# EAGLE board Buttons_1.1 (EAGLE 7.6.0)
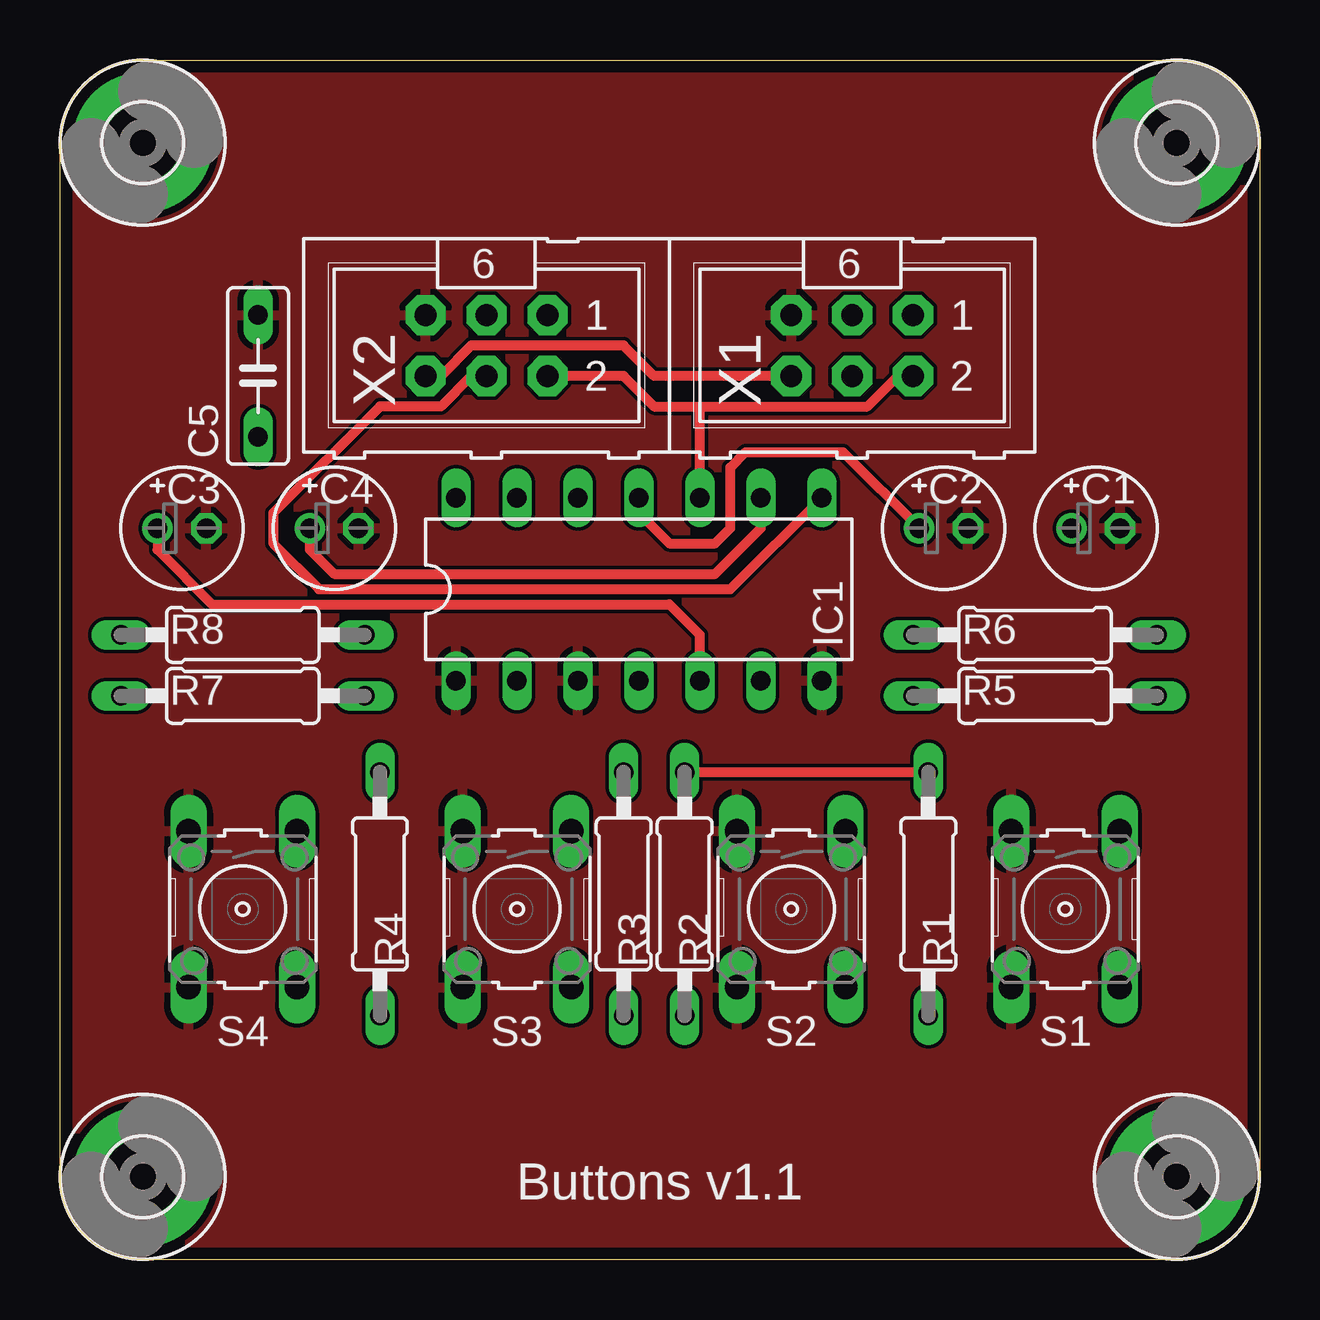
[diagram p0: board, top side]
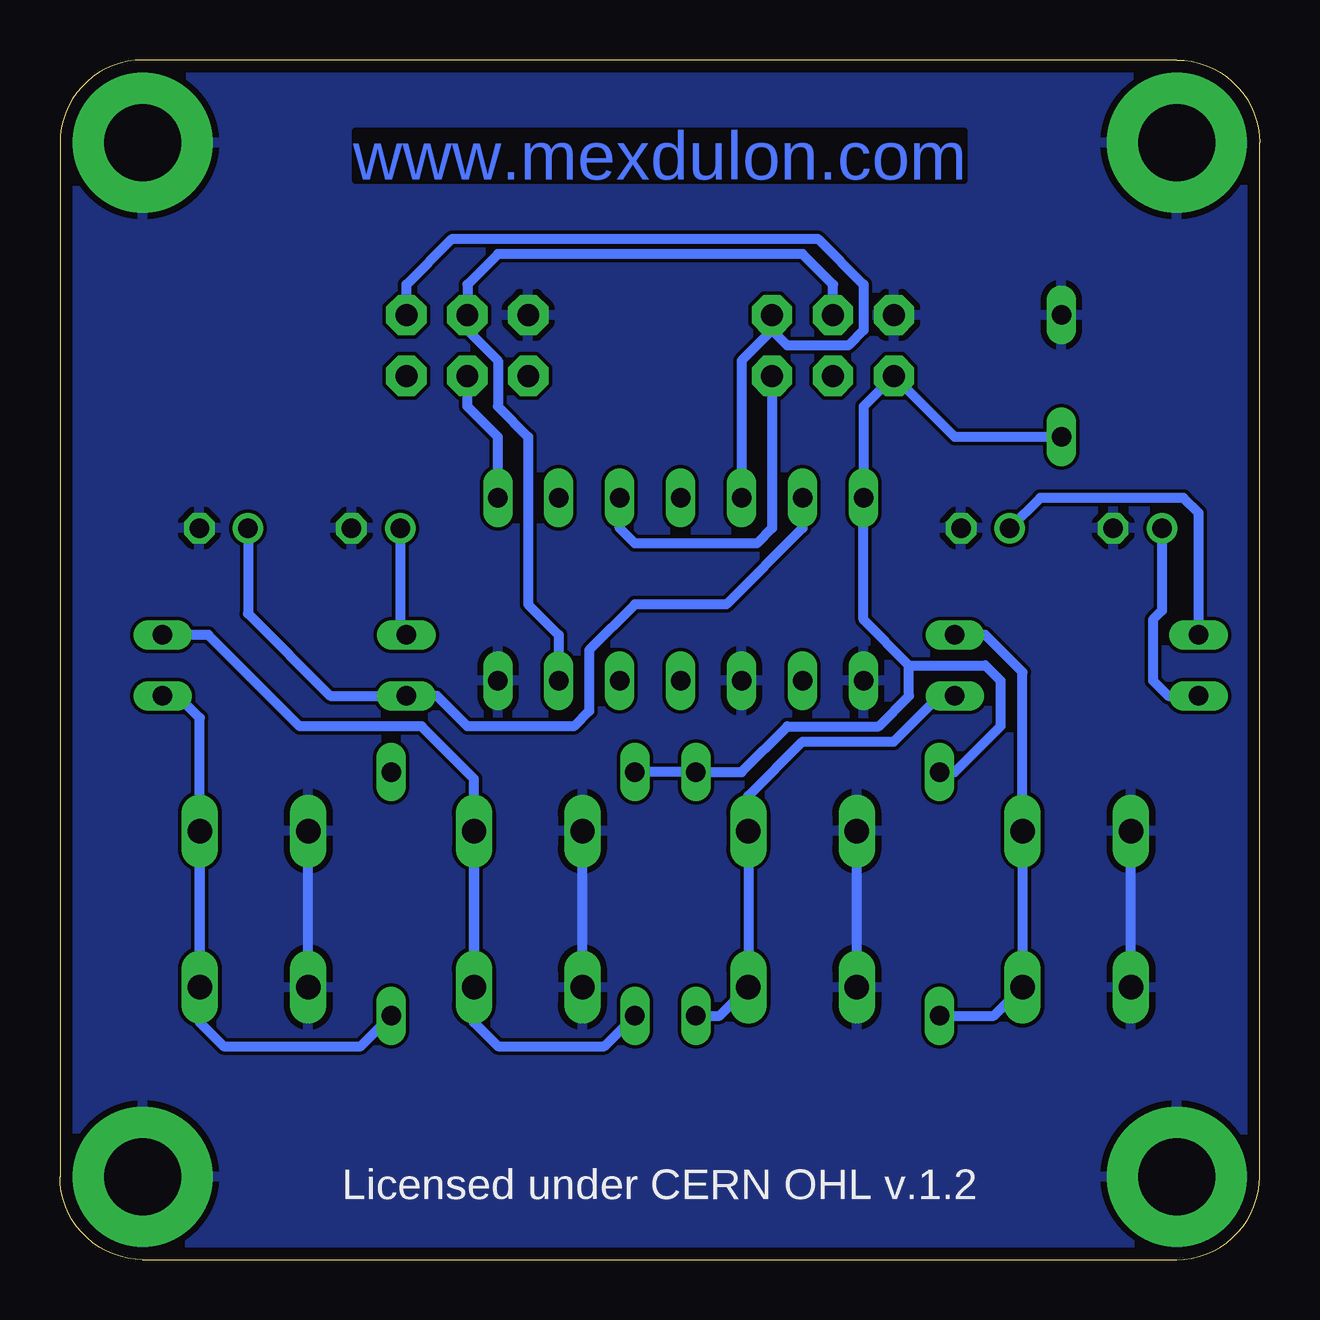
[diagram p1: board, bottom side, seen from below]

Size 50 x 50 mm. Coordinates in mm from the lower left corner, seen from the top.
Outline: 0,3.45 0,46.55 arc-90 3.45,50 46.55,50 arc-90 50,46.55 50,3.45 arc-90 46.55,0 3.45,0 arc-90 0,3.45
Copper layers (1*16): Top 0.035mm / dielectric 1.6mm / Bottom 0.035mm
Design rules "Elecrow_2-layer_PCB_eagle_rule": minimum track width 6mil, minimum drill 12mil, track to track 6mil, track to pad 6mil, pad to pad 6mil, via to via 8mil, smd to smd 0mil, copper to edge 20mil, drill to drill 10mil, minimum pad ring 6mil, minimum via ring 6mil, stop-mask expansion 0mil, vias tented up to drill 100mil, thermal gap 10mil

## Footprints (pad centres in the part's own frame; a part is rotated, then mirrored left to right if it is on the bottom)
E2-5 = drill 0.813 pad 1.27: + -1.016,0 | drill 0.813 pad 1.27 octagon: - 1.016,0
C050-025X075 = drill 0.813 long: 1 -2.54,0; 2 2.54,0
3,2-PAD = drill 3.2 pad 5.842: B3,2 0,0
DIL14 = drill 0.813 long: 1 -7.62,-3.81; 2 -5.08,-3.81; 3 -2.54,-3.81; 4 0,-3.81; 5 2.54,-3.81; 6 5.08,-3.81; 7 7.62,-3.81; 8 7.62,3.81; 9 5.08,3.81; 10 2.54,3.81; 11 0,3.81; 12 -2.54,3.81; 13 -5.08,3.81; 14 -7.62,3.81
0207/10 = drill 0.813 long: 1 -5.08,0; 2 5.08,0
B3F-10XX = drill 1.016 long: 1 -3.251,2.261; 2 3.251,2.261; 3 -3.251,-2.261; 4 3.251,-2.261
ML-6 = drill 0.914 pad 1.676 octagon: 1 -2.54,-1.27; 2 -2.54,1.27; 3 0,-1.27; 4 0,1.27; 5 2.54,-1.27; 6 2.54,1.27

## Placement (x,y rotation side)
C1  1u  [E2-5]  43.18,30.48 0 top
C2  1u  [E2-5]  36.83,30.48 0 top
C3  1u  [E2-5]  5.08,30.48 0 top
C4  1u  [E2-5]  11.43,30.48 0 top
C5  100n  [C050-025X075]  8.26,36.83 90 top
H1  MOUNT-PAD-ROUND3.2  [3,2-PAD]  3.45,3.45 0 top
H2  MOUNT-PAD-ROUND3.2  [3,2-PAD]  3.45,46.55 0 top
H3  MOUNT-PAD-ROUND3.2  [3,2-PAD]  46.55,3.45 0 top
H4  MOUNT-PAD-ROUND3.2  [3,2-PAD]  46.55,46.55 0 top
IC1  74HC14N  [DIL14]  24.13,27.94 0 top
R1  10k  [0207/10]  36.2,15.24 90 top
R2  10k  [0207/10]  26.04,15.24 90 top
R3  10k  [0207/10]  23.5,15.24 90 top
R4  10k  [0207/10]  13.34,15.24 90 top
R5  22k  [0207/10]  40.64,23.5 180 top
R6  22k  [0207/10]  40.64,26.04 180 top
R7  22k  [0207/10]  7.62,23.5 180 top
R8  22k  [0207/10]  7.62,26.04 180 top
S1  [B3F-10XX]  41.91,14.61 270 top
S2  [B3F-10XX]  30.48,14.61 270 top
S3  [B3F-10XX]  19.05,14.61 270 top
S4  [B3F-10XX]  7.62,14.61 270 top
X1  Out  [ML-6]  33.02,38.1 180 top
X2  Out  [ML-6]  17.78,38.1 180 top

## Library data of the parts
C1-C4 = resistor
C5 R1-R8 = 01-my_rcl
H1-H4 = holes
IC1 = 74xx-eu
S1-S4 = switch-omron; MPN: B3F-1000; OC_FARNELL: 176432; OC_NEWARK: 36M3542
X1 X2 = 01-my-con

## Nets
GND: C1.- C2.- C3.- C4.- C5.2 H1.B3,2 H2.B3,2 H3.B3,2 H4.B3,2 IC1.1 IC1.3 IC1.7 S1.3 S1.4 S2.3 S2.4 S3.3 S3.4 S4.3 S4.4 X1.5 X2.5
N$1: IC1.12 X1.1 X2.1
N$2: IC1.10 X1.2 X2.2
N$3: IC1.6 X1.3 X2.3
N$4: R3.1 R7.1 S3.1 S3.2
N$5: C3.+ IC1.5 R7.2
N$6: IC1.8 X1.4 X2.4
N$9: R4.1 R8.1 S4.1 S4.2
N$10: C4.+ IC1.9 R8.2
N$16: R2.1 R6.1 S2.1 S2.2
N$20: C2.+ IC1.11 R6.2
N$24: R1.1 R5.1 S1.1 S1.2
N$25: C1.+ IC1.13 R5.2
VCC: C5.1 IC1.14 R1.2 R2.2 R3.2 R4.2 X1.6 X2.6

## Tracks (layer width: path | path; a pad name or v marks a point on that pad's centre or on a via)
GND
  Bottom 0.406: S3.4 S3.3 | S2.4 S2.3 | S4.4 S4.3 | S1.4 S1.3
  pour Bottom: -0.17,0 -0.17,50.16 50,50.16 50,0
  pour Top: -0.17,0 -0.17,50.16 50,50.16 50,0
N$1
  Bottom 0.406: X2.1 20.32,38.73 | 20.32,38.73 21.59,37.47 IC1.12 | X1.1 35.56,40.64 33.66,42.55 18.41,42.55 16.51,40.64 16.51,38.73 17.14,38.1 19.68,38.1 20.32,38.73
N$2
  Top 0.406: X2.2 23.5,36.83 24.77,35.56 26.67,35.56 | IC1.10 26.67,35.56 | 26.67,35.56 33.66,35.56 34.92,36.83 X1.2
  Bottom 0.406: X2.2 20.32,30.48 20.95,29.84 26.04,29.84 26.67,30.48 IC1.10
N$3
  Bottom 0.406: IC1.6 29.21,26.04 30.48,27.3 30.48,34.29 31.75,35.56 31.75,37.47 33.02,38.73 X1.3 33.02,40.64 31.75,41.91 19.05,41.91 17.78,40.64 X2.3
N$4
  Bottom 0.406: R3.1 22.5,10.16 S3.2 S3.1 21.31,19.33 19.05,21.59 15.24,21.59 13.34,23.5 R7.1
N$5
  Top 0.406: IC1.5 26.67,26.04 25.4,27.3 6.35,27.3 4.06,29.59 C3.+
  Bottom 0.406: C3.+ 4.06,27.05 4.45,26.67 4.45,24.13 3.81,23.5 R7.2
N$6
  Top 0.406: X2.4 17.14,36.83 15.88,35.56 13.34,35.56 8.89,31.11 8.89,29.84 10.79,27.94 27.94,27.94 IC1.8
  Bottom 0.406: IC1.8 31.75,34.29 33.02,35.56 X1.4
N$9
  Bottom 0.406: R4.1 11.07,10.16 S4.2 S4.1 9.88,24.49 11.43,26.04 R8.1
N$10
  Top 0.406: C4.+ 10.41,29.59 11.43,28.57 27.3,28.57 29.21,30.48 IC1.9
  Bottom 0.406: R8.2 2.54,31.11 3.17,31.75 9.14,31.75 C4.+
N$16
  Bottom 0.406: S2.2 S2.1 32.74,20.04 34.92,22.23 40.01,22.23 43.81,26.04 R6.1 | S2.2 32.74,17.5 | S2.2 32.74,9.88 31.75,8.89 27.3,8.89 R2.1
N$20
  Top 0.406: IC1.11 24.13,31.11 25.4,29.84 27.3,29.84 27.94,30.48 27.94,33.02 28.57,33.66 32.64,33.66 C2.+
  Bottom 0.406: C2.+ 35.81,26.29 R6.2
N$24
  Bottom 0.406: S1.1 S1.2 | S1.2 44.17,22.58 45.09,23.5 R5.1 | S1.2 44.17,9.88 43.18,8.89 37.47,8.89 R1.1
N$25
  Bottom 0.406: C1.+ 42.16,26.92 38.73,23.5 R5.2 34.29,23.5 33.02,22.23 28.57,22.23 27.94,22.86 27.94,25.4 26.04,27.3 22.23,27.3 19.05,30.48 IC1.13
VCC
  Top 0.406: X1.6 24.77,36.83 23.5,38.1 17.14,38.1 15.88,36.83 X2.6 | R2.2 R1.2
  Bottom 0.406: R2.2 R3.2 21.59,20.32 19.68,22.23 15.88,22.23 14.61,23.5 14.61,24.77 | 14.61,24.77 11.43,24.77 10.79,24.13 10.79,22.23 12.7,20.32 R4.2 | 14.61,24.77 16.51,26.67 IC1.14 16.51,35.56 X2.6 12.7,34.29 C5.1

## Text on the board
Bottom: www.mexdulon.com
tNames: Buttons v1.1
bNames: Licensed under CERN OHL v.1.2